# Altium PCB AMC_SATA_Adapter.PcbDoc
Units mm, origin at the board's own origin, x right, y up, seen from the top; angles counter-clockwise.
Board outline 97 x 37 mm, 4 copper layers (Top Layer, GND, VSUP, Bottom Layer), stack 1.573 mm thick; 41 components, 114 nets, 333 pads, 171 vias.
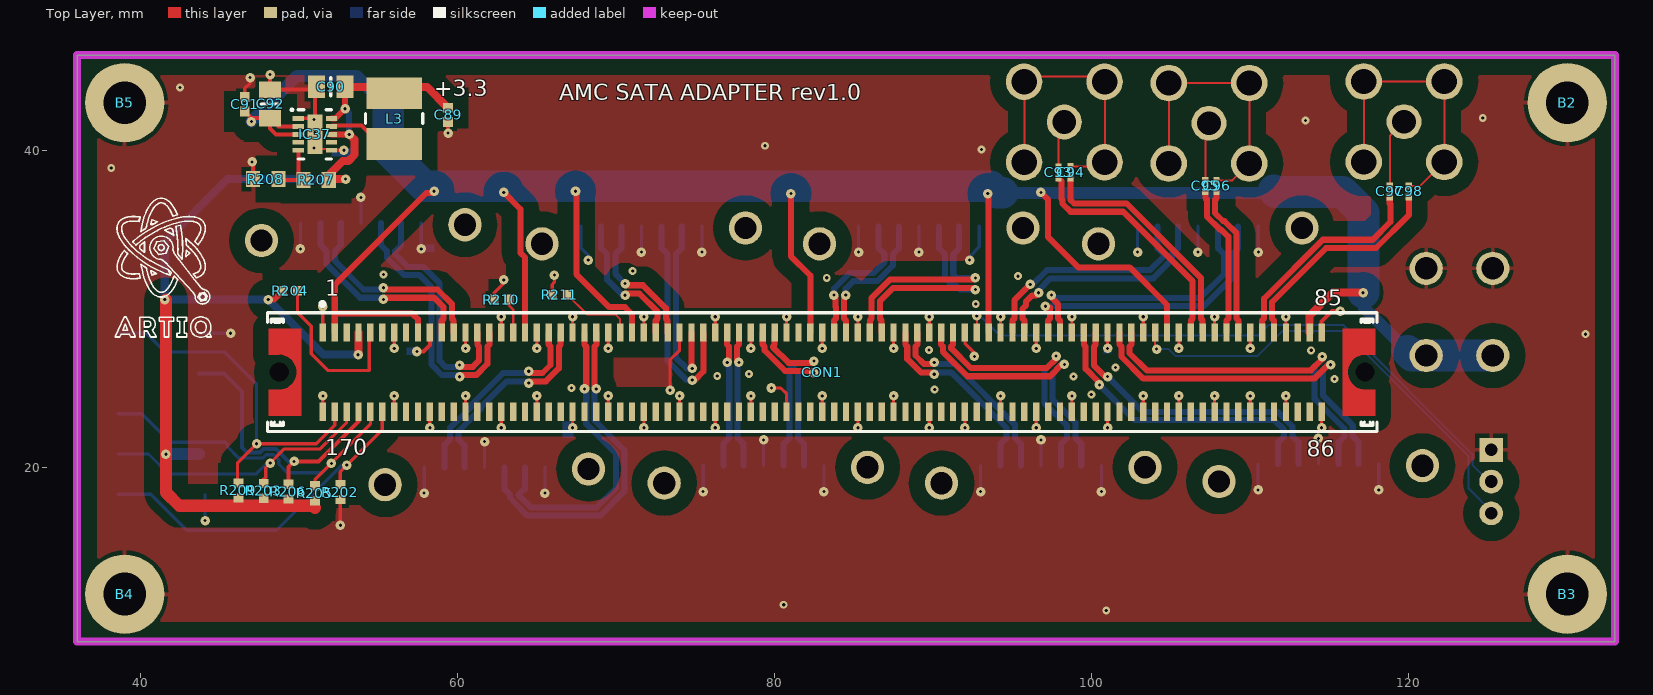
[diagram p0: Top Layer view]
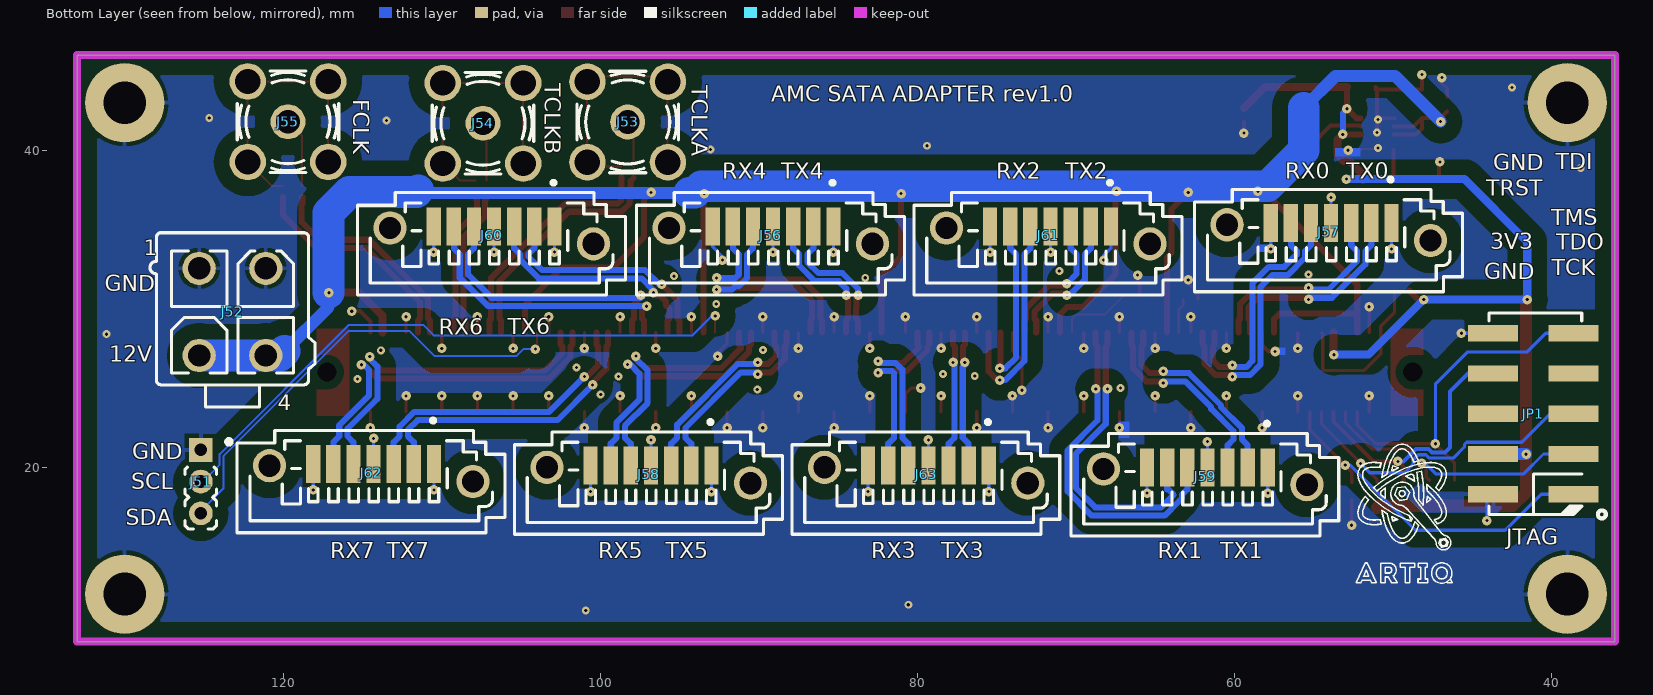
[diagram p1: Bottom Layer view, seen from below]
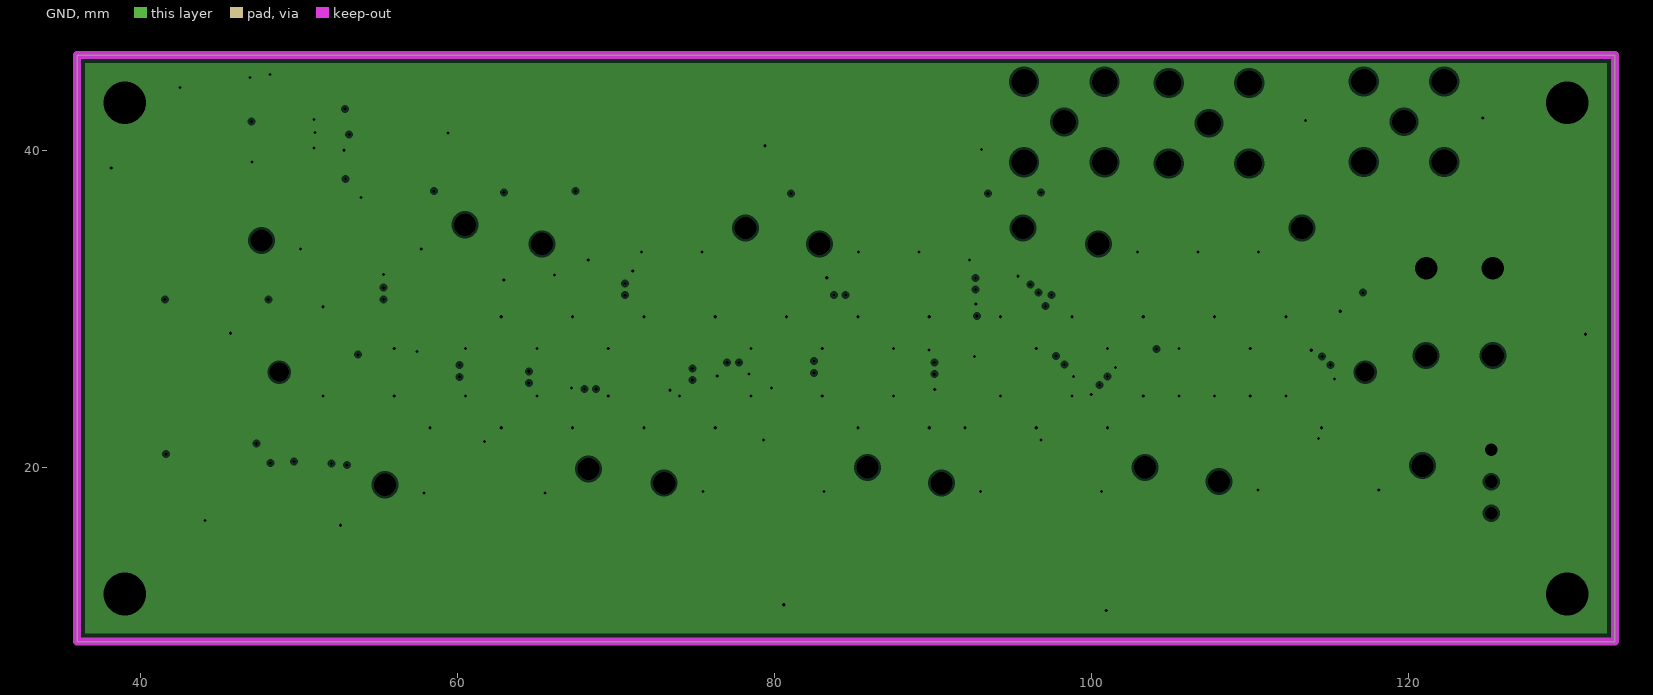
[diagram p2: GND, clearances drawn from the general rule]
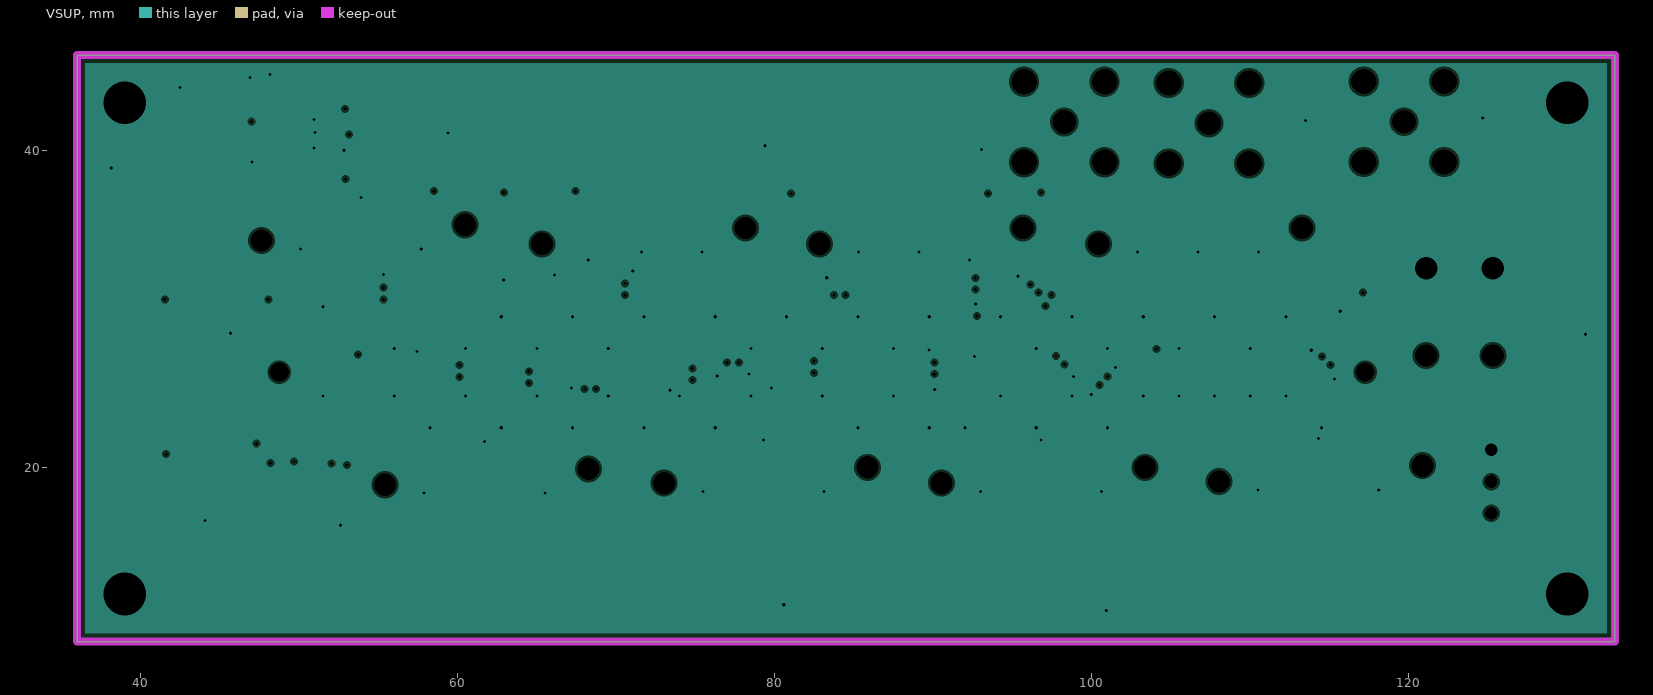
[diagram p3: VSUP, clearances drawn from the general rule]
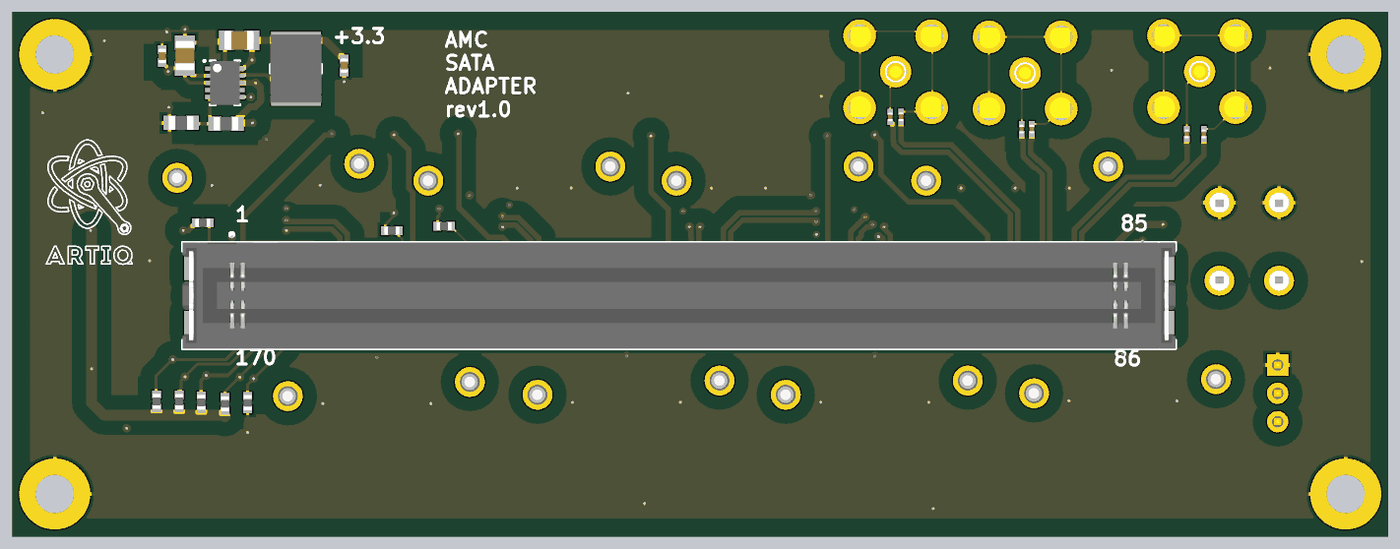
[diagram p4: 3D render of the assembled board from above, using the file's embedded part models]
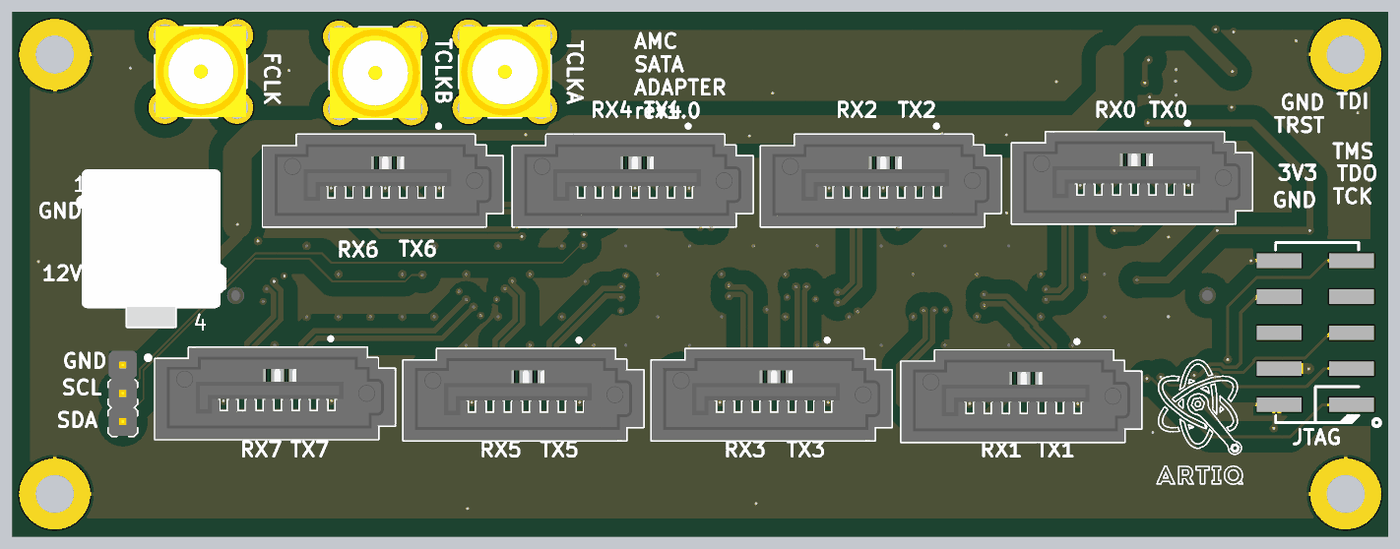
[diagram p5: 3D render of the assembled board from below, using the file's embedded part models]

## Layer stack, top to bottom
Top Solder: solder mask 0.0102, Solder Resist, Dk 3.5
Top Layer: signal copper 0.036
Dielectric1: prepreg 0.36, FR-4, Dk 4.8
GND: plane copper 0.0356, net GND
Dielectric2: core 0.71, FR-4, Dk 4.8
VSUP: plane copper 0.0356, net GND
Dielectric3: prepreg 0.36, FR-4, Dk 4.8
Bottom Layer: signal copper 0.036
Bottom Solder: solder mask 0.0102, Solder Resist, Dk 3.5

## Board outline
36,9 36,46 133,46 133,9

## Design rules (kind name [scope] priority, off if disabled: settings)
AcuteAngle [All] p1: minimum=4.00000000000000E+0001 checktracksonly=FALSE
Clearance Clearance_GNDP [(InPolygon AND InNet('GNDP'))] p1: gap=0.254
Clearance Poly [(InPolygon AND InNet('GND'))] p2: gap=1
Clearance [All] p3: gap=0.127
ComponentClearance [All] p1 off: gap=0.025 collisioncheckmode=3 verticalgap=2540 showdistances=FALSE
DiffPairsRouting [InDifferentialPairClass('All Differential Pairs')] p1: maxlimit=0.152 minlimit=0.127 mostfreqgap=0.14 toplayer_minwidth=0.381 toplayer_maxwidth=0.381 toplayer_prefwidth=0.381 bottomlayer_minwidth=0.381 bottomlayer_maxwidth=0.381 bottomlayer_prefwidth=0.381 maxuncoupledlength=12.7
Height [All] p1 off: minheight=0 maxheight=25.4 prefheight=12.7
HoleSize [All] p1: absolutevalues=TRUE maxlimit=5.08 minlimit=0.19 maxpercent=80.000 minpercent=20.000
Length DDR_CLK_L [InNetClass('DDR_CLK')] p1: maxlimit=80.264 minlimit=77.724
MatchedLengths DDR_CLK [InNetClass('DDR_CLK')] p1: tolerance=0.127 checknetsindiffpair=TRUE checkdiffpairvsdiffpair=FALSE checkxsignals=FALSE checkothers=FALSE
MatchedLengths DDR_D_3 [InNetClass('DDR3_D')] p2: tolerance=0.508 checknetsindiffpair=TRUE checkdiffpairvsdiffpair=FALSE checkxsignals=FALSE checkothers=FALSE
MatchedLengths DDR_D_2 [InNetClass('DDR2_D')] p3: tolerance=0.254 checknetsindiffpair=TRUE checkdiffpairvsdiffpair=FALSE checkxsignals=FALSE checkothers=FALSE
MatchedLengths DDR_D_1 [InNetClass('DDR1_D')] p4: tolerance=0.508 checknetsindiffpair=TRUE checkdiffpairvsdiffpair=FALSE checkxsignals=FALSE checkothers=FALSE
MatchedLengths DDR_D_0 [InNetClass('DDR0_D')] p5: tolerance=0.508 checknetsindiffpair=TRUE checkdiffpairvsdiffpair=FALSE checkxsignals=FALSE checkothers=FALSE
MatchedLengths DDR_A [InNetClass('DDR_A')] p6: tolerance=0.635 checknetsindiffpair=TRUE checkdiffpairvsdiffpair=FALSE checkxsignals=FALSE checkothers=FALSE
MinimumSolderMaskSliver [All] p1 off: minsoldermaskwidth=0
PlaneClearance [All] p1: clearance=0.152
PlaneConnect [All] p1: planeconnectstyle=Direct reliefexpansion=0.508 reliefentries=4 reliefconductorwidth=0.254 reliefairgap=0.254
PolygonConnect PolygonConnect_pad [(InPadClass('All Pads'))] p1: connectstyle=Relief reliefconductorwidth=0.254 reliefentries=4 polygonreliefangle="90 Angle" airgapwidth=0.254
PolygonConnect [All] p2: connectstyle=Direct reliefconductorwidth=0.254 reliefentries=4 polygonreliefangle="90 Angle" airgapwidth=0.254
RoomDefinition AMC_SATA_Adapter [InComponentClass('AMC_SATA_Adapter')] p1 off: confinementstyle=ConfineIn formatcopy=TRUE lockcomponents=FALSE outline 122.123,13.995 106.324,13.995 106.324,9.703 122.123,9.703
RoutingVias [All] p1: holewidth=0.2 width=0.6 viastyle="Through Hole" minholewidth=0.2 minwidth=0.5 maxholewidth=0.5 maxwidth=1
SilkToSilkClearance [All] p1 off: silktosilkclearance=0
SilkToSolderMaskClearance SilkscreenOverComponentPads [IsPad] p1 off: minsilkscreentomaskgap=0.025 clearancetoexposedcopper=TRUE
SolderMaskExpansion [All] p1: expansion=0.102
ViasUnderSMD ViasUnderSMD_ICs [(InComponent('IC14')) OR (InComponent('IC1'))  OR (InComponent('IC11'))] p1: allowed=TRUE
ViasUnderSMD [All] p2: allowed=FALSE
Width DIFF_PAIRS [InDifferentialPairClass('All Differential Pairs')] p1: maxlimit=0.254 minlimit=0.254 preferedwidth=0.254 minimp=50.000000 maximp=50.000000 favimp=50.000000
Width [All] p2: maxlimit=2 minlimit=0.127 preferedwidth=0.203 minimp=0.000000 maximp=0.000000 favimp=100000000000000005400000000000000.000000
21 further rules are at their usual default settings.

## Classes and differential pairs
differential pair class FMC_LA: LA00_CCA LA00_CCB LA01_CCA LA01_CCB LA02A LA02B LA03A LA03B LA04A LA04B LA05A LA05B LA06A LA06B LA07A LA07B LA08A LA08B LA09A LA09B LA10A LA10B LA11A LA11B LA12A LA12B LA13A LA13B LA14A LA14B LA15A LA15B LA16A LA16B LA17_CCA LA17_CCB LA18_CCA LA18_CCB LA19A LA19B LA20A LA20B LA21A LA21B LA22A LA22B LA23A LA23B LA24A LA24B LA25A LA25B LA26A LA26B LA27A LA27B LA28A LA28B LA29A LA29B LA30A LA30B LA31A LA31B LA32A LA32B LA33A LA33B
differential pair class FMC_HB: HB00_CCA HB00_CCB HB01A HB01B HB02A HB02B HB03A HB03B HB04A HB04B HB05A HB05B HB06_CCA HB06_CCB HB07A HB07B HB08A HB08B HB09A HB09B HB10A HB10B HB11A HB11B HB12A HB12B HB13A HB13B HB14A HB14B HB15A HB15B HB16A HB16B HB17_CCA HB17_CCB HB18A HB18B HB19A HB19B HB20A HB20B HB21A HB21B
differential pair TX7: +TX7_P -TX7_N
differential pair TX6: +TX6_P -TX6_N
differential pair TX5: +TX5_P -TX5_N
differential pair TX4: +TX4_P -TX4_N
differential pair RX7: +RX7_P -RX7_N
differential pair RX6: +RX6_P -RX6_N
differential pair RX5: +RX5_P -RX5_N
differential pair RX4: +RX4_P -RX4_N
differential pair TCLKB: +TCLKB_P -TCLKB_N
differential pair TCLKA: +TCLKA_P -TCLKA_N
differential pair FCLKA: +FCLKA_P -FCLKA_N
differential pair RX0: +RX0_P -RX0_N
differential pair RX1: +RX1_P -RX1_N
differential pair RX2: +RX2_P -RX2_N
differential pair RX3: +RX3_P -RX3_N
differential pair TX0: +TX0_P -TX0_N
differential pair TX1: +TX1_P -TX1_N
differential pair TX2: +TX2_P -TX2_N
differential pair TX3: +TX3_P -TX3_N

## Components (designator, comment, footprint, x,y, rotation, side; value= is the part's Value field where it differs from the comment)
B2 "Family" MTG270_500 130,43 r0 top
B3 "Family" MTG270_500 130,12 r0 top
B4 "Family" MTG270_500 39,12 r0 top
B5 "Family" MTG270_500 39,43 r0 top
C89 "100nF" CAPC1005X55N 59.4,42.225 r90 top
C90 "22uF" CAPC2012X135N 52,44 r0 top
C91 "100nF" CAPC1005X55N 46.575,42.9 r270 top
C92 "22uF" CAPC2012X135N 48.175,42.925 r270 top
C93 "100nF" CAPC0603X33N 97.9,38.6 r270 top
C94 "100nF" CAPC0603X33N 98.665,38.615 r270 top
C95 "100nF" CAPC0603X33N 107.163,37.744 r270 top
C96 "100nF" CAPC0603X33N 107.874,37.744 r270 top
C97 "100nF" CAPC0603X33N 118.8,37.4 r270 top
C98 "100nF" CAPC0603X33N 120,37.4 r270 top
CON1 "SAMTEC_MTCA-085-02-S-DV-SMT-K-TR" SAMTEC_MTCA-085-02-S-DV-SMT-K-TR 83,26 r180 top locked
IC37 "TPS62175DQC" SON50P200X300X80-11N-R94X250 51,41 r0 top
J51 "Header 3" HARWIN_M22-2010305 125.2,21.1 r270 bottom
J52 "Mini-Fit Jr.™" MOLEX_39-28-1043 123.2,29.8 r180 bottom
J53 "SMA" HUBER-SUHNER_82_SMA-50-0-41/133_NE 98.273,41.783 r180 bottom
J54 "SMA" HUBER-SUHNER_82_SMA-50-0-41/133_NE 107.4,41.7 r180 bottom
J55 "SMA" HUBER-SUHNER_82_SMA-50-0-41/133_NE 119.7,41.8 r180 bottom
J56 "SATA" MOLEX_67800-5005 89.1,35.2 r0 bottom
J57 "SATA" MOLEX_67800-5005 53.9,35.4 r0 bottom
J58 "SATA" MOLEX_67800-5005 96.8,20.1 r0 bottom
J59 "SATA" MOLEX_67800-5005 61.7,20 r0 bottom
J60 "SATA" MOLEX_67800-5005 106.7,35.2 r0 bottom
J61 "SATA" MOLEX_67800-5005 71.6,35.2 r0 bottom
J62 "SATA" MOLEX_67800-5005 114.3,20.2 r0 bottom
J63 "SATA" MOLEX_67800-5005 79.3,20.1 r0 bottom
JP1 "PLTD10S or 1241050-5" PLTD10S 38.6,18.3 r90 bottom
L3 "10uH" IND_MURATA-PS_8400 56,42 r90 top
R202 "2k2" RESC1005X40N 52.603,18.44 r270 top
R203 "2k2" RESC1005X40N 47.777,18.517 r270 top
R204 "0" RESC1005X40N 49.428,31.14 r180 top
R205 "2k2" RESC1005X40N 51.003,18.364 r270 top
R206 "2k2" RESC1005X40N 49.327,18.466 r90 top
R207 "270k" RESC1608X55N 51.075,38.125 r0 top
R208 "82k" RESC1608X55N 47.9,38.175 r0 top
R209 "2k2" RESC1005X40N 46.177,18.542 r270 top
R210 "0" RESC1005X40N 62.763,30.582 r180 top
R211 "0" RESC1005X40N 66.446,30.886 r180 top

## Footprints (in the part's own frame and the unit in brackets; to place one, negate y for a bottom-side part, rotate by r counter-clockwise, add the part's x,y. Pads: shape width x height; smd on the part's side, far side on the other; paste and mask are expansions set on the pad)
CAPC0603X33N [mm] "Chip Capacitor, Body 0.6x0.30mm, IPC Medium Density"
  rect 0.45x0.4 smd: 1(-0.35,0) 2(0.35,0)
  body extent -0.31,-0.16 0.32,0.17, height 0.33
CAPC1005X55N [mm] "Chip Capacitor, Body 1.0x0.55mm, IPC Medium Density"
  rect 0.62x0.62 smd: 1(-0.45,0) 2(0.45,0)
  body extent -0.52,-0.27 0.53,0.28, height 0.55
CAPC2012X135N [mm] "Chip Capacitor, Body 2.0x1.25mm, IPC Medium Density"
  rect 1.05x1.4 smd: 1(-0.9,0) 2(0.9,0)
  silkscreen extent 0,-0.58 0,0.58, body extent -1.05,-0.67 1.05,0.68, height 1.25
HARWIN_M22-2010305 [mm] "3 Contacts - Pitch 2mm - Single Row Through Mount Straight Header (Post Lead = 3.5mm, Tail Lead 3.4mm, Insulator 1.5mm)"
  rect 1.5x1.5 hole 0.8: 1(0,0)
  round 1.5 hole 0.8: 2(2,0) 3(4,0)
  silkscreen extent -0.66,-1 5,1.93, body extent -1,-1 5,1, height 5
HUBER-SUHNER_82_SMA-50-0-41/133_NE [mm] "50 Ohm SMA Straight PCB Jack"
  round 2.2 hole 1.5: 1(0,0)
  round 2.3 hole 1.6: 2(-2.54,-2.54) 2(-2.54,2.54) 2(2.54,-2.54) 2(2.54,2.54)
  silkscreen extent -3.2,-3.2 3.2,3.2, body extent -3.2,-3.2 3.2,3.2, height 9.5
IND_MURATA-PS_8400 [mm] "Miniature Surface Mount Power Inductors, 4.5mm L X 3.3mm W X 2.9mm H, MURATA 8400 Serie"
  rect 2x3.5 smd: 1(-1.6,0) 2(1.6,0)
  silkscreen extent -0.3,-1.8 0.3,1.8, body extent -2.4,-1.8 2.4,1.8, height 2.9
MOLEX_39-28-1043 [mm] "4.20mm (.165\") Pitch Mini-Fit Jr. Header, Dual Row, Vertical, without Snap-in Plastic Peg PCB Lock, 4 Circuits"
  round 2.1 hole 1.4: 1(-2.1,2.75) 2(2.1,2.75) 3(-2.1,-2.75) 4(2.1,-2.75)
  silkscreen extent -5.2,-6 5.2,5, body extent -5.2,-6 5.2,5, height 12.8
MOLEX_67800-5005 [mm] "1.27mm Pitch, 7 Contacts, Serial ATA High Speed Header, Straight with Locking Latch"
  rect 0.9x2.4 smd: 1(-3.81,0) 2(-2.54,0) 3(-1.27,0) 4(0,0) 5(1.27,0) 6(2.54,0) 7(3.81,0)
  round 2.1 hole 1.4 unplated: MECH1(-6.27,1.1) MECH2(6.56,0.1)
  silkscreen extent -8.28,-2.87 8.61,4.33, body extent -8.28,-2.12 8.62,4.33, height 8.4
MTG270_500 [mm] "Plated Through Hole: Hole Dia.=2.7mm Pad Dia.=5.0mm"
  round 5 hole 2.7: 1(0,0)
PLTD10S [mm]
  rect 1.02x3.15 smd: 1(0,0) 2(0,5.08) 3(2.54,0) 4(2.54,5.08) 5(5.08,0) 6(5.08,5.08) 7(7.62,0) 8(7.62,5.08) 9(10.16,0) 10(10.16,5.08)
  silkscreen extent -1.52,-2.03 11.43,5.33, body extent -1.25,-0.3 11.56,5.58, height 10
RESC1005X40N [mm] "Chip Resistor, EIA 0402, Metric 1005, Body 1.0x0.5mm, IPC Medium Density"
  rect 0.58x0.62 smd: 1(-0.47,0) 2(0.47,0)
  body extent -0.52,-0.27 0.53,0.28, height 0.4
RESC1608X55N [mm] "Chip Resistor, EIA 0603, Metric 1608, Body 1.6x0.8mm, IPC Medium Density"
  rect 0.9x1 smd: 1(-0.8,0) 2(0.8,0)
  body extent -0.87,-0.47 0.88,0.48, height 0.55
SAMTEC_MTCA-085-02-S-DV-SMT-K-TR [mm] "170 Contacts, Pitch 0.75mm, Micro TCA Connector"
  rect 0.4x1.15 smd: 1(31.5,-2.5) 2(30.75,-2.5) 3(30,-2.5) 4(29.25,-2.5) 5(28.5,-2.5) 6(27.75,-2.5) 7(27,-2.5) 8(26.25,-2.5) 9(25.5,-2.5) 10(24.75,-2.5) 11(24,-2.5) 12(23.25,-2.5) 13(22.5,-2.5) 14(21.75,-2.5) 15(21,-2.5) 16(20.25,-2.5) 17(19.5,-2.5) 18(18.75,-2.5) 19(18,-2.5) 20(17.25,-2.5) 21(16.5,-2.5) 22(15.75,-2.5) 23(15,-2.5) 24(14.25,-2.5) 25(13.5,-2.5) 26(12.75,-2.5) 27(12,-2.5) 28(11.25,-2.5) 29(10.5,-2.5) 30(9.75,-2.5) 31(9,-2.5) 32(8.25,-2.5) 33(7.5,-2.5) 34(6.75,-2.5) 35(6,-2.5) 36(5.25,-2.5) 37(4.5,-2.5) 38(3.75,-2.5) 39(3,-2.5) 40(2.25,-2.5) 41(1.5,-2.5) 42(0.75,-2.5) 43(0,-2.5) 44(-0.75,-2.5) 45(-1.5,-2.5) 46(-2.25,-2.5) 47(-3,-2.5) 48(-3.75,-2.5) 49(-4.5,-2.5) 50(-5.25,-2.5) 51(-6,-2.5) 52(-6.75,-2.5) 53(-7.5,-2.5) 54(-8.25,-2.5) 55(-9,-2.5) 56(-9.75,-2.5) 57(-10.5,-2.5) 58(-11.25,-2.5) 59(-12,-2.5) 60(-12.75,-2.5) 61(-13.5,-2.5) 62(-14.25,-2.5) 63(-15,-2.5) 64(-15.75,-2.5) 65(-16.5,-2.5) 66(-17.25,-2.5) 67(-18,-2.5) 68(-18.75,-2.5) 69(-19.5,-2.5) 70(-20.25,-2.5) 71(-21,-2.5) 72(-21.75,-2.5) 73(-22.5,-2.5) 74(-23.25,-2.5) 75(-24,-2.5) 76(-24.75,-2.5) 77(-25.5,-2.5) 78(-26.25,-2.5) 79(-27,-2.5) 80(-27.75,-2.5) 81(-28.5,-2.5) 82(-29.25,-2.5) 83(-30,-2.5) 84(-30.75,-2.5) 85(-31.5,-2.5) 86(-31.5,2.5) 87(-30.75,2.5) 88(-30,2.5) 89(-29.25,2.5) 90(-28.5,2.5) 91(-27.75,2.5) 92(-27,2.5) 93(-26.25,2.5) 94(-25.5,2.5) 95(-24.75,2.5) 96(-24,2.5) 97(-23.25,2.5) 98(-22.5,2.5) 99(-21.75,2.5) 100(-21,2.5) 101(-20.25,2.5) 102(-19.5,2.5) 103(-18.75,2.5) 104(-18,2.5) 105(-17.25,2.5) 106(-16.5,2.5) 107(-15.75,2.5) 108(-15,2.5) 109(-14.25,2.5) 110(-13.5,2.5) 111(-12.75,2.5) 112(-12,2.5) 113(-11.25,2.5) 114(-10.5,2.5) 115(-9.75,2.5) 116(-9,2.5) 117(-8.25,2.5) 118(-7.5,2.5) 119(-6.75,2.5) 120(-6,2.5) 121(-5.25,2.5) 122(-4.5,2.5) 123(-3.75,2.5) 124(-3,2.5) 125(-2.25,2.5) 126(-1.5,2.5) 127(-0.75,2.5) 128(0,2.5) 129(0.75,2.5) 130(1.5,2.5) 131(2.25,2.5) 132(3,2.5) 133(3.75,2.5) 134(4.5,2.5) 135(5.25,2.5) 136(6,2.5) 137(6.75,2.5) 138(7.5,2.5) 139(8.25,2.5) 140(9,2.5) 141(9.75,2.5) 142(10.5,2.5) 143(11.25,2.5) 144(12,2.5) 145(12.75,2.5) 146(13.5,2.5) 147(14.25,2.5) 148(15,2.5) 149(15.75,2.5) 150(16.5,2.5) 151(17.25,2.5) 152(18,2.5) 153(18.75,2.5) 154(19.5,2.5) 155(20.25,2.5) 156(21,2.5) 157(21.75,2.5) 158(22.5,2.5) 159(23.25,2.5) 160(24,2.5) 161(24.75,2.5) 162(25.5,2.5) 163(26.25,2.5) 164(27,2.5) 165(27.75,2.5) 166(28.5,2.5) 167(29.25,2.5) 168(30,2.5) 169(30.75,2.5) 170(31.5,2.5)
  round 1 hole 1.2 unplated mask+0.1: 171(-34.25,0) 172(34.25,0)
  Top Layer region: 34.9,2.75 34.9,1.1 34.25,1.1 33.7,0.953 33.297,0.55 33.15,0 33.297,-0.55 33.7,-0.953 34.25,-1.1 34.25,-1.1 34.9,-1.1 34.9,-2.75 32.85,-2.75 32.85,2.75
  Top Layer region: -34.9,-2.75 -34.9,-1.1 -34.25,-1.1 -33.7,-0.953 -33.297,-0.55 -33.15,0 -33.297,0.55 -33.7,0.953 -34.25,1.1 -34.25,1.1 -34.9,1.1 -34.9,2.75 -32.85,2.75 -32.85,-2.75
  silkscreen extent -35,-4.42 35,3.75, body extent -35,-3.75 35,3.75, height 12.85
SON50P200X300X80-11N-R94X250 [mm] "SON, 10-Leads, Body 2x3mm, Pitch 0.5mm, Thermal Pad 0.94x2.5mm, IPC Medium Density"
  rect 0.7x0.3 smd: 1(-1.05,1) 2(-1.05,0.5) 3(-1.05,0) 4(-1.05,-0.5) 5(-1.05,-1) 6(1.05,-1) 7(1.05,-0.5) 8(1.05,0) 9(1.05,0.5) 10(1.05,1)
  rect 0.94x2.5 smd: 11(0,0)
  silkscreen extent -1.5,-1.55 1.05,1.6, body extent -1.05,-1.55 1.05,1.55, height 0.8

## Part data
B2 B3 B4 B5: library part "Through Hole Pad", "Through Hole Pad"
C89 C91: library part CC0402_100NF_16V_10%_X5R, "Non-polarised capacitor"
C90 C92: library part CC0805_22UF_16V_10%_X5R, "Non-polarised capacitor"
C93 C94 C95 C96 C97 C98: library part CC0201_100NF_6.3V_10%_X5R, "Non-polarised capacitor"
CON1: "170 Poles,  Micro TCA (Telecom Computing Architecture) Edge Card Socket"
IC37: "4.75-28VDC to 1-6VDC, 500mA Step-Down Converter With Sleep Mode"
J51: library part HARWIN_M22-2010305, "Connector 3 Male"
J52: library part MOLEX_39-28-1043, "Connector 4 Male"
J53 J54 J55: library part HUBER-SUHNER_82_SMA-50-0-41/133_NE
J56 J57 J58 J59 J60 J61 J62 J63: library part MOLEX_67800-5005, "7 Pin SATA Receptacle"
JP1: library part "CON_2x5 2.54 male SMT", "Goldpin 2.54mm, male header"
L3: library part IND_10UH_10%_MURATA-PS_8400, "Inductor With Core"
R202 R203 R205 R206 R209: library part R0402_2K2_1%_0.0625W_100PPM, "Resistor - 1%"
R204 R210 R211: library part R0402_0R_JUMPER, "Resistor"
R207: library part R0603_270K_1%_0.1W_100PPM, "Resistor - 1%"
R208: library part R0603_82K_1%_0.1W_100PPM, "Resistor - 1%"

## Via types
v1: diameter 0.6, hole 0.2, Top Layer to Bottom Layer, tented both sides, 144 vias
v2: diameter 0.5, hole 0.2, Top Layer to Bottom Layer, tented both sides, 27 vias

## Nets (pads, with @x,y where several pads share a name; then routed paths per layer and width w, separated by ;. In a path a pad name is that pad's centre, name@x,y a point inside that pad or via, vN(x,y) a via of type N, cw(c..) or ccw(c..) an arc to the next point about the centre after c; other vN are vias at no path point)
ENABLE#: CON1.41
FCLKA_N: C98.2 CON1.81 | length 14
  Top Layer w0.381: CON1.81 111.5,29.266 111.385,29.38 111.385,30.429 114.789,33.833 117.932,33.833 120,35.901 C98.2
FCLKA_P: C97.2 CON1.80 | length 13.8
  Top Layer w0.381: CON1.80 110.75,29.266 110.865,29.38 110.865,30.645 114.573,34.354 117.716,34.354 118.834,35.471 118.834,36.601 118.8,36.635 C97.2
GA0: CON1.5 R204.1 | length 10.9
  Top Layer w0.203: R204.1 49.898,29.781 50.775,28.905 50.775,27.153 51.816,26.111 54.432,26.111 54.432,28.432 CON1.5
GA1: CON1.17 R210.1 | length 2.2
  Top Layer w0.152: R210.1 63.233,30.213 63.5,29.947 CON1.17
GA2: CON1.26 R211.1 | length 4.8
  Top Layer w0.127: R211.1 68.161,29.642 69.952,29.642 70.25,29.343 CON1.26
GND: B2.1 B3.1 B4.1 B5.1 C89.1 C90.1 C91.1 C92.1 CON1.1 CON1.7 CON1.10 CON1.13 CON1.16 CON1.19 CON1.22 CON1.25 CON1.28 CON1.31 CON1.34 CON1.37 CON1.40 CON1.43 CON1.46 CON1.49 CON1.52 CON1.55 CON1.58 CON1.61 CON1.64 CON1.67 CON1.70 CON1.73 CON1.76 CON1.79 CON1.82 CON1.85 CON1.86 CON1.89 CON1.92 CON1.95 CON1.98 CON1.101 CON1.104 CON1.107 CON1.110 CON1.113 CON1.116 CON1.119 CON1.122 CON1.125 CON1.128 CON1.131 CON1.134 CON1.137 CON1.140 CON1.143 CON1.146 CON1.149 CON1.152 CON1.155 CON1.158 CON1.161 CON1.164 CON1.170 IC37.1 IC37.6 IC37.11 J51.1 J52.1 J52.2 J56.1 J56.4 J56.7 J57.1 J57.4 J57.7 J58.1 J58.4 J58.7 J59.1 J59.4 J59.7 J60.1 J60.4 J60.7 J61.1 J61.4 J61.7 J62.1 J62.4 J62.7 J63.1 J63.4 J63.7 JP1.2 JP1.10 R202.2 R208.1 R210.2 R211.2 | length 123
  Top Layer w0.203: C91.1 46.575,43.897 46.908,44.23 v1(46.908,44.587) ; CON1.170 v1(51.5,24.502) ; CON1.1 51.5,29.853 v1(51.5,30.127) ; IC37.6 52.553,40 v1(52.827,40) ; v1(52.603,16.343) 52.603,16.617 R202.2 ; CON1.164 v1(56,24.502) ; v1(56,27.498) 56,27.772 CON1.7 ; v1(58.25,22.498) CON1.161 ; CON1.158 v1(60.5,24.502) ; v1(60.5,27.498) 60.5,27.772 CON1.13 ; R210.2 62.293,30.987 62.91,31.603 v1(62.91,31.819) ; v1(62.75,22.498) CON1.155 ; CON1.16 62.75,29.228 v1(62.75,29.502) ; CON1.152 v1(65,24.502) ; v1(65,27.498) 65,27.772 CON1.19 ; R211.2 65.976,31.533 66.11,31.667 v1(66.11,32.124) ; v1(67.25,22.498) CON1.149 ; CON1.22 67.25,29.228 v1(67.25,29.502) ; CON1.146 v1(69.5,24.502) ; v1(69.5,27.498) 69.5,27.772 CON1.25 ; v1(71.75,22.498) CON1.143 ; CON1.28 71.75,29.228 v1(71.75,29.502) ; v1(73.399,24.864) 73.399,26.775 74,27.376 CON1.31 ; CON1.140 v1(74,24.502) ; v1(76.25,22.498) CON1.137 ; CON1.34 76.25,29.228 v1(76.25,29.502) ; CON1.134 v1(78.5,24.502) ; v1(78.5,27.498) 78.5,27.772 CON1.37 ; v1(79.8,25.002) 80.376,25.002 80.75,24.628 CON1.131 ; CON1.40 80.75,29.228 v1(80.75,29.502) ; CON1.128 v1(83,24.502) ; v1(83,27.498) 83,27.772 CON1.43 ; v1(85.25,22.498) CON1.125 ; CON1.46 85.25,29.228 v1(85.25,29.502) ; CON1.122 v1(87.5,24.502) ; v1(87.5,27.498) 87.5,27.772 CON1.49 ; v1(89.75,22.498) CON1.119 ; CON1.52 89.75,29.228 v1(89.75,29.502) ; v1(92,22.498) 92,22.772 CON1.116 ; CON1.55 92,27.822 92.601,27.221 v1(92.601,26.998) ; CON1.113 94.25,24.228 v1(94.25,24.502) ; CON1.58 94.25,29.228 v1(94.25,29.502) ; v1(96.5,22.498) 96.5,22.772 CON1.110 ; v1(96.5,27.498) 96.5,27.772 CON1.61 ; CON1.107 98.75,24.228 v1(98.75,24.502) ; CON1.64 98.75,29.228 v1(98.75,29.502) ; v1(101,22.498) 101,22.772 CON1.104 ; v1(101,27.498) 101,27.772 CON1.67 ; CON1.101 103.25,24.228 v1(103.25,24.502) ; CON1.70 103.25,29.228 v1(103.25,29.502) ; CON1.98 v1(105.5,24.502) ; v1(105.5,27.498) 105.5,27.772 CON1.73 ; CON1.95 107.75,24.228 v1(107.75,24.502) ; CON1.76 107.75,29.228 v1(107.75,29.502) ; CON1.92 v1(110,24.502) ; v1(110,27.498) 110,27.772 CON1.79 ; CON1.89 112.25,24.228 v1(112.25,24.502) ; CON1.82 112.25,29.228 v1(112.25,29.502) ; v1(114.5,22.498) 114.5,22.772 CON1.86
  Top Layer w0.254: v1(47.041,39.268) 47.1,39.209 R208.1 ; v1(48.175,44.771) C92.1 50.914,43.825 C90.1@51,43.739 ; IC37.11 C90.1@51,43.739 ; C90.1@51.1,43.839 C90.1@51,43.739 ; C90.1 51,43.9 C90.1@51,43.739 ; v1(57.429,27.305) 57.836,27.305 58.25,27.719 CON1.10 ; v1(59.4,41.087) C89.1 ; CON1.85 114.5,29.188 115.157,29.845 v1(115.672,29.845)
  Bottom Layer w0.203: JP1.10 v1(45.682,28.46) ; v1(44.069,16.636) 44.069,16.909 JP1.2@44.069,18.263 ; v1(50.09,33.773) 50.09,34.047 J57.1 ; J57.4 53.9,36.753 v1(53.9,37.027) ; v1(57.71,33.773) 57.71,34.047 J57.7 ; v1(57.89,18.373) J59.1 ; J59.4 v1(61.7,21.627) ; v1(65.51,18.373) J59.7 ; J61.1 67.79,33.823 68.244,33.37 v1(68.244,33.073) ; v1(71.6,33.573) 71.6,33.847 J61.4 ; v1(75.41,33.573) 75.41,33.847 J61.7 ; v1(75.49,18.473) 75.49,18.747 J63.1 ; J63.4 79.3,21.453 v1(79.3,21.727) ; v1(83.11,18.473) 83.11,18.747 J63.7 ; v1(85.29,33.573) 85.29,33.847 J56.1 ; v1(89.1,33.573) 89.1,33.847 J56.4 ; v1(92.3,33.073) 92.3,33.292 92.91,33.901 J56.7 ; v1(92.99,18.473) 92.99,18.747 J58.1 ; J58.4 96.8,21.453 v1(96.8,21.727) ; v1(100.61,18.473) 100.61,18.747 J58.7 ; v1(102.89,33.573) 102.89,33.847 J60.1 ; v1(106.7,33.573) 106.7,33.847 J60.4 ; v1(110.49,18.573) 110.49,18.847 J62.1 ; v1(110.51,33.573) 110.51,33.847 J60.7 ; J62.4 114.3,21.553 v1(114.3,21.827) ; v1(118.11,18.573) 118.11,18.847 J62.7
  other v2: 100.914,10.973 80.569,11.328 99.974,24.587 90.094,24.917 67.183,24.994 115.316,25.578 98.857,25.73 76.378,25.756 78.384,25.883 101.498,26.289 113.843,27.381 89.738,27.407 131.14,28.397 92.685,30.302 83.287,31.953 95.352,32.055 55.321,32.156 71.044,32.385 38.151,38.887 93.04,40.056 50.952,40.132 79.4,40.284 51,41.123 113.487,41.885 50.952,41.935 124.663,42.037 42.494,43.967
NetC93_1: C93.1 J53.1 | length 3.3
  Top Layer w0.127: C93.1 97.9,41.7 J53.1@98.3,42.1
NetC94_1: C94.1 J53.2 | length 17.7
  Top Layer w0.127: J53.2@95.76,39.56 95.76,44.64 100.84,44.64 100.84,39.56 100.245,38.965 C94.1
NetC95_1: C95.1 J54.1 | length 3.7
  Top Layer w0.127: C95.1 107.163,41.463 J54.1
NetC96_1: C96.1 J54.2 | length 17.7
  Top Layer w0.127: J54.2@104.86,39.16 104.86,44.24 109.94,44.24 109.94,39.16 108.874,38.094 C96.1
NetC97_1: C97.1 J55.1 | length 4.4
  Top Layer w0.127: C97.1 118.8,40.9 J55.1
NetC98_1: C98.1 J55.2 | length 18.1
  Top Layer w0.127: J55.2@117.16,39.26 117.16,44.34 122.24,44.34 122.24,39.26 120.73,37.75 C98.1
NetIC37_5: IC37.5 R207.1 R208.2 | length 3.6
  Top Layer w0.254: R208.2 48.75,38.125 R207.1 49.95,38.45 IC37.5
NetIC37_9: IC37.9 L3.1 | length 4.4
  Top Layer w0.254: IC37.9 52.1,41.55 53.929,41.55 55.079,40.4 L3.1
P3V3: C89.2 C90.2 CON1.4 IC37.8 IC37.10 JP1.4 L3.2 R203.2 R204.2 R205.2 R206.1 R207.2 R209.2 | length 74.3
  Top Layer w0.381: v1(48.057,30.582) 48.4,30.582 R204.2 ; IC37.8 v1@53.158,41 ; IC37.10 52.287,42 v1(52.9,42.613) C90.2
  Top Layer w0.508: C90.2 58.075,44 C89.2 ; v1(52.934,38.176) 51.926,38.176 R207.2 51.875,38.438 52.756,39.319 53.109,39.319 53.508,39.718 53.508,40.282 53.492,40.298 53.492,40.665 v1(53.162,40.996) v1@53.158,41 ; v1(53.721,27.102) 53.75,27.131 CON1.4
  Top Layer w0.762: v1@41.605,30.582 v1(41.605,20.828) 41.605,18.415 42.445,17.575 50.875,17.575 51,17.45
  Bottom Layer w0.381: v1(52.9,42.613) 53.162,42.351 v1(53.162,40.996)
  Bottom Layer w0.508: v1(52.934,38.176) 45.491,38.176 41.529,34.214 v1(41.529,30.582) v1(48.057,30.582) 51.537,27.102 v1(53.721,27.102)
  Bottom Layer w0.762: v1(41.605,20.828) 41.617,20.84 JP1.4
P12V0: C91.2 C92.2 CON1.2 CON1.9 CON1.18 CON1.27 CON1.42 CON1.57 CON1.72 CON1.84 IC37.2 IC37.3 J52.3 J52.4 | length 185.4
  Top Layer w0.254: C91.2 47,42.025 C92.2 ; IC37.3 48.535,41 48.175,41.36 C92.2 ; IC37.2 48.7,41.5 C92.2
  Top Layer w0.381: CON1.2 52.25,29.669 ; CON1.9 57.5,29.343 57.15,29.693 52.273,29.693 52.25,29.669 ; v1@58.522,37.313 58.039,37.313 52.25,31.524 52.25,29.669 ; v1(62.916,37.338) 63.963,36.291 63.963,33.534 64.25,33.246 CON1.18 ; v1(67.437,37.414) 67.49,37.361 67.49,32.18 69.571,30.099 70.561,30.099 71,29.66 CON1.27 ; v1(81.026,37.262) 81.026,33.325 82.25,32.101 CON1.42 ; v1(93.447,37.262) 93.5,37.208 CON1.57 ; v1(96.799,37.338) 97.231,36.906 97.231,34.544 99.162,32.614 102.387,32.614 104.75,30.251 CON1.72
  Top Layer w0.508: CON1.84 113.75,29.574 115.189,31.013 v1(117.119,31.013)
  Bottom Layer w0.762: v1(46.99,41.808) 49.86,44.679 53.619,44.679 55.626,42.672 ; 94.386,37.313 115.875,37.313 117.145,36.043 ; v1@117.145,31.013 117.145,30.099 119.913,27.33 125.02,27.33 J52.3
  Bottom Layer w2: 55.626,42.672 55.626,40.005 57.904,37.727 93.627,37.727 94.041,37.313 94.386,37.313 ; 111.477,37.477 111.586,37.368 115.832,37.368 117.145,36.055 117.145,36.043 v1@117.145,31.013 ; 119.913,27.33 120.194,27.05 J52.4 J52.3
  other v1: 58.522,37.414
PS0#: CON1.83
PS1#: CON1.3
RX0_N: CON1.15 J57.5 | length 17
  Top Layer w0.381: v1(60.122,25.71) 60.231,25.819 61.176,25.819 61.885,26.529 61.885,27.62 62,27.735 CON1.15
  Bottom Layer w0.381: J57.5 55.17,34.01 55.545,33.635 55.545,33.211 56.637,32.118 57.607,32.118 58.344,31.382 58.344,26.492 59.017,25.819 60.012,25.819 v1(60.122,25.71)
RX0_P: CON1.14 J57.6 | length 15.3
  Top Layer w0.381: v1(60.122,26.449) 60.231,26.34 60.96,26.34 61.365,26.744 61.365,27.62 61.25,27.735 CON1.14
  Bottom Layer w0.381: J57.6 56.44,34.01 56.065,33.635 56.065,33.426 56.853,32.639 57.823,32.639 58.865,31.597 58.865,26.708 59.233,26.34 60.012,26.34 v1(60.122,26.449)
RX1_N: CON1.24 J59.5 | length 21.1
  Top Layer w0.381: v1(68.745,24.943) 68.635,25.052 68.635,27.62 68.75,27.735 CON1.24
  Bottom Layer w0.381: J59.5 62.97,18.61 63.31,18.27 63.31,18.11 ; 63.462,17.894 64.402,16.954 68.999,16.954 70.523,18.479 70.523,21.069 68.635,22.957 68.635,24.833 v1(68.745,24.943)
RX1_P: CON1.23 J59.6 | length 19.7
  Top Layer w0.381: CON1.23 68,27.735 68.115,27.62 68.115,25.052 v1(68.005,24.943)
  Bottom Layer w0.381: J59.6 64.24,18.61 64.177,18.61 63.83,18.263 64.618,17.475 68.783,17.475 70.002,18.694 70.002,20.854 68.115,22.741 68.115,24.833 v1(68.005,24.943)
RX2_N: CON1.33 J61.5 | length 14.1
  Top Layer w0.381: v1(74.803,25.499) 74.955,25.499 75.5,26.044 CON1.33
  Bottom Layer w0.381: J61.5 72.87,33.81 73.245,33.435 73.245,26.705 74.451,25.499 v1(74.803,25.499)
RX2_P: CON1.32 J61.6 | length 12
  Top Layer w0.381: CON1.32 74.75,26.291 v1(74.803,26.238)
  Bottom Layer w0.381: J61.6 74.14,33.81 73.765,33.435 73.765,26.92 74.447,26.238 v1(74.803,26.238)
RX3_N: CON1.39 J63.5 | length 12
  Top Layer w0.381: CON1.39 80,27.735 79.885,27.62 79.885,27.584 80.876,26.594 82.364,26.594 v1(82.474,26.703)
  Bottom Layer w0.381: J63.5 80.57,21.491 80.945,21.865 80.945,26.157 81.382,26.594 82.364,26.594 v1(82.474,26.703)
RX3_P: CON1.38 J63.6 | length 12
  Top Layer w0.381: CON1.38 79.25,27.735 79.365,27.62 79.365,27.369 80.66,26.073 82.364,26.073 v1(82.474,25.964)
  Bottom Layer w0.381: J63.6 81.84,21.491 81.465,21.865 81.465,25.941 81.597,26.073 82.364,26.073 v1(82.474,25.964) v1@82.517,25.921
RX4_N: CON1.48 J56.5 | length 14.1
  Top Layer w0.381: CON1.48 86.75,29.266 86.635,29.38 86.635,30.476 87.478,31.318 92.55,31.318 v1(92.659,31.209)
  Bottom Layer w0.381: J56.5 90.37,33.81 90.745,33.435 90.745,31.941 91.258,31.428 91.473,31.428 91.692,31.209 v1(92.659,31.209)
RX4_P: CON1.47 J56.6 | length 14
  Top Layer w0.381: CON1.47 86,29.266 86.115,29.38 86.115,30.692 87.262,31.839 92.55,31.839 v1(92.659,31.948)
  Bottom Layer w0.381: J56.6 91.64,33.81 91.265,33.435 91.265,32.156 91.473,31.948 v1(92.659,31.948)
RX5_N: CON1.54 J58.5 | length 16.5
  Top Layer w0.381: CON1.54 91.25,27.735 91.135,27.62 91.135,27.508 92.38,26.264 97.155,26.264 97.751,26.859 v1(97.751,27.014)
  Bottom Layer w0.381: v1(97.751,27.014) 97.751,26.859 97.015,26.124 97.015,24.048 98.445,22.619 98.445,21.865 98.07,21.491 J58.5
RX5_P: CON1.53 J58.6 | length 17.4
  Top Layer w0.381: CON1.53 90.5,27.735 90.615,27.62 90.615,27.293 92.164,25.743 97.371,25.743 98.119,26.491 v1(98.274,26.491)
  Bottom Layer w0.381: v1(98.274,26.491) 98.119,26.491 97.536,25.908 97.536,24.264 98.965,22.835 98.965,21.865 99.34,21.491 J58.6
RX6_N: CON1.63 J60.5 | length 17.6
  Top Layer w0.381: v1(97.46,30.861) 97.384,30.785 97.885,30.283 97.885,29.38 98,29.266 CON1.63
  Bottom Layer w0.381: v1(97.46,30.861) 97.434,30.861 97.384,30.81 97.353,30.78 97.449,30.683 106.858,30.683 108.345,32.17 108.345,33.435 107.97,33.81 J60.5
RX6_P: CON1.62 J60.6 | length 17.5
  Top Layer w0.381: CON1.62 97.25,29.266 97.365,29.38 97.365,30.067
  Bottom Layer w0.381: v1@97.155,30.163 107.073,30.163 108.865,31.954 108.865,33.435 109.24,33.81 J60.6
  other v1: 97.079,30.163
RX7_N: CON1.69 J62.5 | length 22.3
  Top Layer w0.381: CON1.69 102.5,27.735 102.385,27.62 102.385,27.203 103.477,26.111 113.817,26.111 114.54,26.834 v1(114.54,26.989)
  Bottom Layer w0.381: v1(114.54,26.989) 114.54,26.834 114.211,26.505 114.059,26.352 114.059,24.321 114.211,24.168 115.945,22.435 115.945,21.965 115.57,21.591 J62.5
RX7_P: CON1.68 J62.6 | length 23.2
  Top Layer w0.381: CON1.68 101.75,27.735 101.865,27.62 101.865,26.988 103.262,25.591 114.033,25.591 114.908,26.466 v1(115.063,26.466)
  Bottom Layer w0.381: v1(115.063,26.466) 114.908,26.466 114.579,26.137 114.579,24.537 116.465,22.65 116.465,21.965 116.84,21.591 J62.6
RX8_N: CON1.87
RX8_P: CON1.88
RX9_N: CON1.93
RX9_P: CON1.94
RX10_N: CON1.99
RX10_P: CON1.100
RX11_N: CON1.105
RX11_P: CON1.106
RX12_N: CON1.111
RX12_P: CON1.112
RX13_N: CON1.117
RX13_P: CON1.118
RX14_N: CON1.123
RX14_P: CON1.124
RX15_N: CON1.129
RX15_P: CON1.130
RX17_N: CON1.141
RX17_P: CON1.142
RX18_N: CON1.147
RX18_P: CON1.148
RX19_N: CON1.153
RX19_P: CON1.154
RX20_N: CON1.159
RX20_P: CON1.160
SCL_L: CON1.56 J51.2 | length 38.8
  Top Layer w0.127: CON1.56 v1(92.75,29.551)
  Bottom Layer w0.127: v1(92.75,29.551) 92.953,29.551 94.183,28.321 110.515,28.321 111.176,28.981 115.849,28.981 124.006,20.825 124.006,20.166 125.071,19.1 J51.2
SDA_L: CON1.71 J51.3 | length 29
  Top Layer w0.127: CON1.71 104,27.521 104.064,27.457 v1(104.089,27.457)
  Bottom Layer w0.127: v1(104.089,27.457) 104.847,27.457 105.297,27.007 110.446,27.007 112.039,28.6 115.871,28.6 123.752,20.72 123.752,18.694 J51.3@125.273,17.173
TCK: CON1.165 JP1.1 R202.1 | length 22.6
  Top Layer w0.203: R202.1@52.6,19.05 52.6,19.707 55.25,22.357 CON1.165
  Bottom Layer w0.203: JP1.1 40.653,18.3 42.926,16.027 48.576,16.027 52.691,20.142 v1(53.01,20.142)
TCLKA_N: C94.2 CON1.75 | length 15.2
  Top Layer w0.381: C94.2 98.665,36.857 98.882,36.64 102.197,36.64 106.885,31.951 106.885,29.38 107,29.266 CON1.75
TCLKA_P: C93.2 CON1.74 | length 15.2
  Top Layer w0.381: C93.2 98.09,38.059 98.09,36.911 98.144,36.857 98.144,36.641 98.667,36.119 101.981,36.119 106.365,31.735 106.365,29.38 106.25,29.266 CON1.74
TCLKB_N: C96.2 CON1.78 | length 9.6
  Top Layer w0.381: C96.2 107.874,36.979 107.779,36.884 107.779,36.036 108.28,35.535 108.36,35.535 109.135,34.76 109.135,29.38 109.25,29.266 CON1.78
TCLKB_P: C95.2 CON1.77 | length 9.6
  Top Layer w0.381: C95.2 107.163,36.979 107.258,36.884 107.258,35.821 108.065,35.014 108.145,35.014 108.615,34.544 108.615,29.38 108.5,29.266 CON1.77
TCLKC_N: CON1.135
TCLKC_P: CON1.136
TCLKD_N: CON1.138
TCLKD_P: CON1.139
TDI: CON1.169 JP1.9 R209.1 | length 22.9
  Top Layer w0.203: R209.1@46.125,19.175 46.125,20.293 v1(47.32,21.488) 51.079,21.488 52.25,22.659 CON1.169
  Bottom Layer w0.203: JP1.9 40.349,28.46 41.529,27.28 45.288,27.28 47.32,25.248 v1(47.32,21.488)
TDO: CON1.168 JP1.3 R203.1 | length 18.3
  Top Layer w0.203: R203.1@47.7,19.227 47.7,19.175 47.904,19.379 47.904,19.99 v1(48.184,20.269) 49.073,21.158 51.333,21.158 53,22.825 CON1.168
  Bottom Layer w0.203: JP1.3 40.501,20.84 41.758,19.583 47.295,19.583 47.981,20.269 v1(48.184,20.269)
TMS: CON1.166 JP1.5 R205.1 | length 21.6
  Top Layer w0.203: R205.1@51,19.05 51,19.225 54.5,22.725 CON1.166
  Bottom Layer w0.203: JP1.5 40.069,23.38 41.871,21.579 45.35,21.579 45.484,21.445 45.484,21.293 46.198,20.579 47.697,20.579 47.916,20.798 48.403,20.798 48.712,20.488 48.712,20.208 49.26,19.66 51.46,19.66 v1(52.045,20.244)
TRST#: CON1.167 JP1.8 R206.2 | length 17.7
  Top Layer w0.254: R206.2@49.325,19.125 49.325,20.013 v1(49.682,20.371) 51.232,20.371 53.75,22.889 CON1.167
  Bottom Layer w0.254: JP1.8 45.276,25.92 46.406,24.79 46.406,21.234 46.706,20.934 47.55,20.934 47.769,21.153 48.55,21.153 49.333,20.371 v1(49.682,20.371)
TX0_N: CON1.12 J57.3 | length 13
  Top Layer w0.381: v1(55.321,31.326) 55.431,31.217 56.388,31.217 ; 56.4,31.217 58.733,31.217 59.635,30.315 59.635,29.38 59.75,29.266 CON1.12
  Bottom Layer w0.381: J57.3 52.63,34.01 52.255,33.635 52.255,33.025 54.064,31.217 55.212,31.217 v1(55.321,31.326)
TX0_P: CON1.11 J57.2 | length 13
  Top Layer w0.381: v1(55.321,30.586) 55.431,30.696 58.518,30.696 59.115,30.099 59.115,29.38 59,29.266 CON1.11
  Bottom Layer w0.381: J57.2 51.36,34.01 51.735,33.635 51.735,32.809 53.848,30.696 55.212,30.696 v1(55.321,30.586)
TX1_N: CON1.21 J59.3 | length 12.9
  Top Layer w0.381: v1(64.491,25.316) 64.6,25.425 65.57,25.425 66.383,26.238 66.383,27.617 66.5,27.735 CON1.21
  Bottom Layer w0.381: J59.3 60.43,21.391 60.055,21.765 60.055,22.276 61.468,23.688 61.468,23.8 63.094,25.425 64.381,25.425 v1(64.491,25.316)
TX1_P: CON1.20 J59.2 | length 12.9
  Top Layer w0.381: v1(64.491,26.056) 64.6,25.946 65.354,25.946 65.862,26.454 65.862,27.622 65.75,27.735 CON1.20
  Bottom Layer w0.381: J59.2 59.16,21.391 59.535,21.765 59.535,22.491 60.843,23.8 60.843,23.911 62.878,25.946 64.381,25.946 v1(64.491,26.056)
TX2_N: CON1.30 J61.3 | length 8.8
  Top Layer w0.381: v1(70.561,31.593) 70.671,31.483 71.687,31.483 73.135,30.035 73.135,29.38 73.25,29.266 CON1.30
  Bottom Layer w0.381: J61.3 70.33,33.81 69.955,33.435 69.955,32.199 v1(70.561,31.593)
TX2_P: CON1.29 J61.2 | length 9
  Top Layer w0.381: v1(70.561,30.853) 70.671,30.963 71.472,30.963 72.615,29.82 72.615,29.38 72.5,29.266 CON1.29
  Bottom Layer w0.381: J61.2 69.06,33.81 69.435,33.435 69.435,31.828 70.41,30.853 v1(70.561,30.853)
TX3_N: CON1.36 J63.3 | length 8.7
  Top Layer w0.381: v1(77.745,26.619) 77.635,26.729 77.635,27.62 77.75,27.735 CON1.36
  Bottom Layer w0.381: v1(77.745,26.619) 77.655,26.53 77.655,21.865 78.03,21.491 J63.3
TX3_P: CON1.35 J63.2 | length 8.7
  Top Layer w0.381: CON1.35 77,27.735 77.115,27.62 77.115,26.729 v1(77.005,26.619)
  Bottom Layer w0.381: J63.2 76.76,21.491 77.135,21.865 77.135,26.338 77.005,26.468 v1(77.005,26.619)
TX4_N: CON1.45 J56.3 | length 9.1
  Top Layer w0.381: v1(84.48,30.861) 84.385,30.766 84.385,29.38 84.5,29.266 CON1.45
  Bottom Layer w0.381: v1(84.48,30.861) 84.48,31.267 84.95,31.737 86.465,31.737 87.455,32.728 87.455,33.435 87.83,33.81 J56.3
TX4_P: CON1.44 J56.2 | length 9.2
  Top Layer w0.381: v1(83.741,30.861) 83.85,30.752 83.85,30.113 83.865,30.099 83.865,29.38 83.75,29.266 CON1.44
  Bottom Layer w0.381: v1(83.741,30.861) 83.741,31.264 84.735,32.258 86.249,32.258 86.935,32.944 86.935,33.435 86.56,33.81 J56.2
TX5_N: CON1.51 J58.3 | length 12.4
  Top Layer w0.381: CON1.51 89,27.735 88.885,27.62 88.885,27.053 89.433,26.505 89.959,26.505 v1(90.068,26.614)
  Bottom Layer w0.381: v1(90.068,26.614) 90.178,26.505 91.345,26.505 95.155,22.695 95.155,21.865 95.53,21.491 J58.3
TX5_P: CON1.50 J58.2 | length 12.4
  Top Layer w0.381: CON1.50 88.25,27.735 88.365,27.62 88.365,26.837 89.218,25.984 89.959,25.984 v1(90.068,25.875)
  Bottom Layer w0.381: v1(90.068,25.875) 90.178,25.984 91.129,25.984 94.635,22.479 94.635,21.865 94.26,21.491 J58.2
TX6_N: CON1.60 J60.3 | length 14.7
  Top Layer w0.381: CON1.60 95.75,29.266 95.635,29.38 95.635,29.999 95.862,30.226 95.862,30.467 96.224,30.828 96.379,30.828 96.386,30.836 96.472,30.836 v1(96.648,31.012)
  Bottom Layer w0.381: v1(96.648,31.012) 96.648,31.167 97.396,31.915 103.887,31.915 105.055,33.084 105.055,33.435 105.43,33.81 J60.3
TX6_P: CON1.59 J60.2 | length 14.7
  Top Layer w0.381: CON1.59 95,29.266 95.115,29.38 95.115,30.525 v1(96.125,31.535)
  Bottom Layer w0.381: v1(96.125,31.535) 96.28,31.535 97.181,32.436 103.671,32.436 104.535,33.299 104.535,33.435 104.16,33.81 J60.2
TX7_N: CON1.66 J62.3 | length 18.8
  Top Layer w0.381: CON1.66 100.25,27.735 100.135,27.62 100.135,26.433 100.849,25.719 v1(101.004,25.719)
  Bottom Layer w0.381: v1(101.004,25.719) 103.223,23.5 111.729,23.5 112.655,22.574 112.655,21.965 113.03,21.591 J62.3
TX7_P: CON1.65 J62.2 | length 18.9
  Top Layer w0.381: CON1.65 99.5,27.735 99.615,27.62 99.615,26.217 100.481,25.351 v1(100.481,25.196)
  Bottom Layer w0.381: v1(100.481,25.196) 102.698,22.979 111.514,22.979 112.135,22.358 112.135,21.965 111.76,21.591 J62.2
TX8_N: CON1.90
TX8_P: CON1.91
TX9_N: CON1.96
TX9_P: CON1.97
TX10_N: CON1.102
TX10_P: CON1.103
TX11_N: CON1.108
TX11_P: CON1.109
TX12_N: CON1.114
TX12_P: CON1.115
TX13_N: CON1.120
TX13_P: CON1.121
TX14_N: CON1.126
TX14_P: CON1.127
TX15_N: CON1.132
TX15_P: CON1.133
TX17_N: CON1.144
TX17_P: CON1.145
TX18_N: CON1.150
TX18_P: CON1.151
TX19_N: CON1.156
TX19_P: CON1.157
TX20_N: CON1.162
TX20_P: CON1.163
pads on no net: CON1.6 CON1.8 CON1.171 CON1.172 IC37.4 IC37.7 J56.MECH1 J56.MECH2 J57.MECH1 J57.MECH2 J58.MECH1 J58.MECH2 J59.MECH1 J59.MECH2 J60.MECH1 J60.MECH2 J61.MECH1 J61.MECH2 J62.MECH1 J62.MECH2 J63.MECH1 J63.MECH2 JP1.6 JP1.7

## Polygon pours and split planes (outlines as drawn)
GND on Top Layer "Top Overlay-No Net" (solid, remove dead copper, pour order 42): 36,46 132.486,46 132.486,9.514 133,9 132.881,9.119 36,9.119
GND on Bottom Layer "Top Overlay-No Net" (solid, remove dead copper, pour order 44): 35.763,46.126 132.842,46.126 132.969,46.253 132.842,46.126 132.842,9 35.67,9 35.408,8.738
GND on GND (split plane): 132.49,9.51 36.51,9.51 36.51,45.49 132.49,45.49
GND on VSUP (split plane): 132.49,9.51 36.51,9.51 36.51,45.49 132.49,45.49

## Keep-outs
Keep-Out Layer:
  lines w0.508: 36,9 36,39 36,46 133,46 133,9 36,9

## Other copper
Top Layer:
  rectangle net GND: 51.232,40 52.05,40.132
  rectangle net GND: 49.784,41.91 50.8,42.113
Bottom Layer:
  rectangle net GND: 57.71,33.587 58.543,34.047
  rectangle net GND: 66.624,21.838 67.32,22.885
  rectangle net GND: 100.736,27.178 101.244,27.559
  rectangle net GND: 56.769,27.076 57.506,27.559
  rectangle net GND: 52.05,39.613 53.655,40.132

## Silkscreen, mask and mechanical layers (free items; w line width, h text height)
Top Overlay:
  drawing of 1216 lines, arcs and shapes, not listed
  text "+3.3" at 58.522,43.409 h1.02
  text "AMC SATA ADAPTER rev1.0" at 66.421,43.155 h1.02
  text "1" at 51.664,30.836 h1.02
  text "85" at 114.046,30.201 h1.02
  text "170" at 51.638,20.752 h1.02
  text "86" at 113.563,20.676 h1.02
Bottom Overlay:
  drawing of 1216 lines, arcs and shapes, not listed
  text "TCLKB" at 103.505,44.221 h1.02 r90
  text "TCLKA" at 94.234,44.094 h1.02 r90
  text "FCLK" at 115.595,43.231 h1.02 r90
  text "AMC SATA ADAPTER rev1.0" at 89.23,43.053 h1.02
  text "TDI" at 39.726,38.811 h1.02
  text "GND" at 43.688,38.735 h1.02
  text "TX0" at 52.934,38.202 h1.02
  text "RX0" at 56.794,38.202 h1.02
  text "TX2" at 70.663,38.202 h1.02
  text "RX2" at 75.032,38.202 h1.02
  text "TX4" at 88.57,38.202 h1.02
  text "RX4" at 92.311,38.202 h1.02
  text "TRST" at 44.12,37.135 h1.02
  text "TMS" at 40.005,35.281 h1.02
  text "3V3" at 43.866,33.757 h1.02
  text "TDO" at 39.7,33.731 h1.02
  text "TCK" at 39.98,32.106 h1.02
  text "GND" at 44.247,31.852 h1.02
  text "GND" at 131.267,31.09 h1.02
  text "TX6" at 105.842,28.397 h1.02
  text "RX6" at 110.185,28.346 h1.02
  text "12V" at 130.962,26.67 h1.02
  text "GND" at 129.515,20.498 h1.02
  text "SCL" at 129.591,18.618 h1.02
  text "SDA" at 129.946,16.332 h1.02
  text "JTAG" at 42.85,15.113 h1.02
  text "TX1" at 60.884,14.249 h1.02
  text "RX1" at 64.846,14.249 h1.02
  text "TX3" at 78.486,14.249 h1.02
  text "RX3" at 82.906,14.249 h1.02
  text "TX5" at 95.86,14.249 h1.02
  text "RX5" at 100.127,14.249 h1.02
  text "TX7" at 113.462,14.249 h1.02
  text "RX7" at 117.018,14.249 h1.02
Outline:
  lines w0.508: 36,9 36,39 36,46 133,46 133,9 36,9

## Text inside footprints (layer, text, board x,y; h text height)
J52: Mechanical 14 "1" at 128.792,33.382 h1; Mechanical 14 "4" at 120.333,23.6 h1; Bottom Overlay "1" at 128.792,33.382 h1; Bottom Overlay "4" at 120.333,23.6 h1